# Altium PCB RadiationDetector.PcbDoc (part 3 of 3)
Units mm, origin at the board's own origin, x right, y up, seen from the top; angles counter-clockwise.
Board outline 64 x 110 mm, 2 copper layers (Top Layer, Bottom Layer); 114 components, 79 nets, 398 pads, 0 vias.
Unrouted connection lines stored in the file: 269.
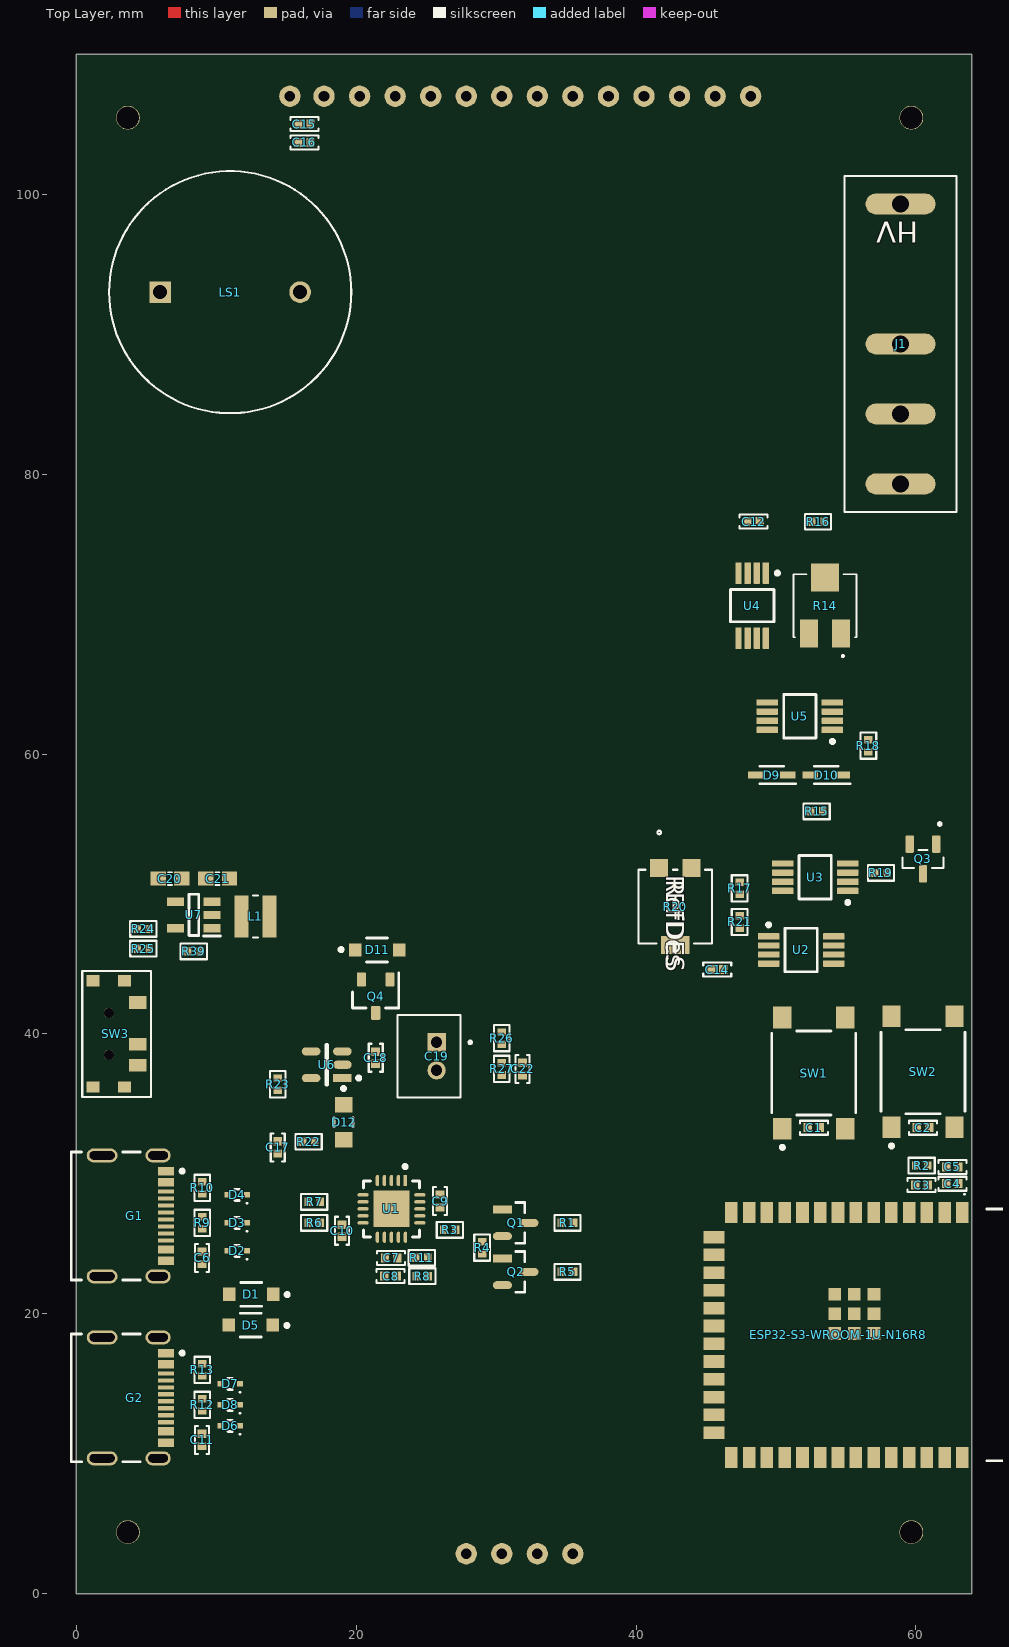
[diagram p0: Top Layer view]

## Part data (continued)
R26: library part RC0402JR-07470KL, "RES 470K OHM 5% 1/16W 0402", Case/Package=0402, LCSC Part Number=C137865, Manufacturer=Yageo, Max Operating Temperature=155°C, Min Operating Temperature=-55°C, Package Height=0.35mm, Package Length=1mm, Package Shape=Rectangular, Package Width=0.5mm, Power=62.5mW, Rated Temperature=70°C, Resistor Type="FIXED RESISTOR", Supplier Part Number=311-470KJRDKR-ND, Temperature Coefficient (ppm/Cel)=100, Tolerance=5%, Working Voltage=50V, Additional Feature="LASER TRIMMABLE", Category="Chip SMD Resistors", ComponentLink1Description=https://datasheet.ciiva.com:443/pdfs/VipMasterIC/IC/YAGO/YAGO-S-A0008145938/YAGO-S-A0008145938-1.pdf?src-supplier=IHS+Markit, ComponentLink1URL=https://datasheet.ciiva.com:443/pdfs/VipMasterIC/IC/YAGO/YAGO-S-A0008145938/YAGO-S-A0008145938-1.pdf?src-supplier=IHS+Markit, ComponentLink2Description=https://datasheet.ciiva.com/2452/pyu-r-int-thick-7-2452630.pdf?src-supplier=Digikey, ComponentLink2URL=https://datasheet.ciiva.com/2452/pyu-r-int-thick-7-2452630.pdf?src-supplier=Digikey, ComponentLink3Description=https://datasheet.ciiva.com/2452/pyu-r-int-thick-7-2452631.pdf?src-supplier=Digikey, ComponentLink3URL=https://datasheet.ciiva.com/2452/pyu-r-int-thick-7-2452631.pdf?src-supplier=Digikey, ComponentLink4Description=https://datasheet.ciiva.com/2452/pyu-r-int-thick-7-2452629.pdf?src-supplier=Digikey, ComponentLink4URL=https://datasheet.ciiva.com/2452/pyu-r-int-thick-7-2452629.pdf?src-supplier=Digikey, ComponentLink5Description=https://datasheet.ciiva.com/12667/pyu-rc0402-51-rohs-l-6-r-12667098.pdf?src-supplier=Mouser, ComponentLink5URL=https://datasheet.ciiva.com/12667/pyu-rc0402-51-rohs-l-6-r-12667098.pdf?src-supplier=Mouser, ComponentLink6Description=https://datasheet.ciiva.com/7850/1018594-7850214.pdf?src-supplier=Element14, ComponentLink6URL=https://datasheet.ciiva.com/7850/1018594-7850214.pdf?src-supplier=Element14, ComponentLink7Description=https://datasheet.ciiva.com/7850/1018594-7850215.pdf?src-supplier=Element14, ComponentLink7URL=https://datasheet.ciiva.com/7850/1018594-7850215.pdf?src-supplier=Element14, Construction=Chip, JESD-609 Code=e3, Manufacturer Part Number=RC0402JR-07470KL, Mounting Technology="Surface Mount", Packaging="Tape and Reel", Pins=2, Pricing="1=0,1, 10=0,006, 50=0,0056, 100=0,0051, 500=0,0046, 1000=0,00408, 5000=0,00284 (USD)", Reach SVHC Compliant=Yes, RoHS=Yes, RoHS Compliant=Yes, Stock=161829, Supplier=Digikey, Technology="METAL GLAZE/THICK FILM", Terminal Finish=Nickel, Termination=Wraparound
R27: library part RC0402JR-07150KL, "RES 150K OHM 5% 1/16W 0402", Case/Package=0402, LCSC Part Number=C93947, Manufacturer=Yageo, Max Operating Temperature=155°C, Min Operating Temperature=-55°C, Package Height=0.35mm, Package Length=1mm, Package Shape=Rectangular, Package Width=0.5mm, Power=62.5mW, Rated Temperature=70°C, Resistor Type="FIXED RESISTOR", Supplier Part Number=311-150KJRCT-ND, Temperature Coefficient (ppm/Cel)=100, Tolerance=5%, Working Voltage=50V, Additional Feature="LASER TRIMMABLE", Category="Chip SMD Resistors", ComponentLink1Description=https://datasheet.ciiva.com:443/pdfs/VipMasterIC/IC/YAGO/YAGO-S-A0008145938/YAGO-S-A0008145938-1.pdf?src-supplier=IHS+Markit, ComponentLink1URL=https://datasheet.ciiva.com:443/pdfs/VipMasterIC/IC/YAGO/YAGO-S-A0008145938/YAGO-S-A0008145938-1.pdf?src-supplier=IHS+Markit, ComponentLink2Description=https://datasheet.ciiva.com/7983/1018594-7983551.pdf?src-supplier=Element14, ComponentLink2URL=https://datasheet.ciiva.com/7983/1018594-7983551.pdf?src-supplier=Element14, ComponentLink3Description=https://datasheet.ciiva.com/2518/pyu-r-int-thick-7-2518929.pdf?src-supplier=Digikey, ComponentLink3URL=https://datasheet.ciiva.com/2518/pyu-r-int-thick-7-2518929.pdf?src-supplier=Digikey, ComponentLink4Description=https://datasheet.ciiva.com/2518/pyu-r-int-thick-7-2518930.pdf?src-supplier=Digikey, ComponentLink4URL=https://datasheet.ciiva.com/2518/pyu-r-int-thick-7-2518930.pdf?src-supplier=Digikey, ComponentLink5Description=https://datasheet.ciiva.com/2518/pyu-r-int-thick-7-2518928.pdf?src-supplier=Digikey, ComponentLink5URL=https://datasheet.ciiva.com/2518/pyu-r-int-thick-7-2518928.pdf?src-supplier=Digikey, ComponentLink6Description=https://datasheet.ciiva.com/7850/1018594-7850149.pdf?src-supplier=Element14, ComponentLink6URL=https://datasheet.ciiva.com/7850/1018594-7850149.pdf?src-supplier=Element14, ComponentLink7Description=https://datasheet.ciiva.com/17072/pyu-rc0402-51-rohs-l-6-r-17072379.pdf?src-supplier=Future+Electronics, ComponentLink7URL=https://datasheet.ciiva.com/17072/pyu-rc0402-51-rohs-l-6-r-17072379.pdf?src-supplier=Future+Electronics, ComponentLink8Description=https://datasheet.ciiva.com/15189/getdatasheetpartid-251830-15189543.pdf?src-supplier=Verical, ComponentLink8URL=https://datasheet.ciiva.com/15189/getdatasheetpartid-251830-15189543.pdf?src-supplier=Verical, Construction=Chip, JESD-609 Code=e3, Manufacturer Part Number=RC0402JR-07150KL, Mounting Technology="Surface Mount", Packaging="Tape and Reel", Pins=2, Pricing="1=0,1, 10=0,006, 50=0,0052, 100=0,0041, 500=0,00356, 1000=0,00306 (USD)", Reach SVHC Compliant=Yes, RoHS=Yes, RoHS Compliant=Yes, Stock=408329, Supplier=Digikey, Technology="METAL GLAZE/THICK FILM", Terminal Finish=Nickel, Termination=Wraparound
R28: library part AC0402FR-07560RL, "RES SMD 560 OHM 1% 1/16W 0402", Case/Package=0402, LCSC Part Number=C144747, Manufacturer=Yageo, Max Operating Temperature=155°C, Min Operating Temperature=-55°C, Package Height=0.32mm, Package Length=1mm, Package Shape=Rectangular, Package Width=0.5mm, Power=62.5mW, Rated Temperature=70°C, Resistor Type="FIXED RESISTOR", Supplier Part Number=13-AC0402FR-07560RLCT-ND, Temperature Coefficient (ppm/Cel)=100, Tolerance=1%, Working Voltage=50V, Additional Feature="LASER TRIMMABLE", Category="Chip SMD Resistors", ComponentLink1Description=https://datasheet.ciiva.com:443/pdfs/VipMasterIC/IC/YAGO/YAGO-S-A0003597364/YAGO-S-A0003597364-1.pdf?src-supplier=IHS+Markit, ComponentLink1URL=https://datasheet.ciiva.com:443/pdfs/VipMasterIC/IC/YAGO/YAGO-S-A0003597364/YAGO-S-A0003597364-1.pdf?src-supplier=IHS+Markit, ComponentLink2Description=http://www.mouser.com/ds/2/447/yageodocoutput-1111992.pdf?src-supplier=Mouser, ComponentLink2URL=http://www.mouser.com/ds/2/447/yageodocoutput-1111992.pdf?src-supplier=Mouser, ComponentLink3Description=https://datasheet.octopart.com/AC0402FR-07560RL-Yageo-datasheet-151884373.pdf?src-supplier=Future+Electronics, ComponentLink3URL=https://datasheet.octopart.com/AC0402FR-07560RL-Yageo-datasheet-151884373.pdf?src-supplier=Future+Electronics, ComponentLink4Description=http://www.yageo.com/documents/recent/PYu-AC_51_RoHS_L_2_revised.pdf?src-supplier=Future+Electronics, ComponentLink4URL=http://www.yageo.com/documents/recent/PYu-AC_51_RoHS_L_2_revised.pdf?src-supplier=Future+Electronics, ComponentLink5Description=http://www.yageo.com/NewPortal/yageodocoutput?fileName=/pdf/R-Chip/PYu-AC_51_RoHS_L_6.pdf&src-supplier=Digikey, ComponentLink5URL=http://www.yageo.com/NewPortal/yageodocoutput?fileName=/pdf/R-Chip/PYu-AC_51_RoHS_L_6.pdf&src-supplier=Digikey, ComponentLink6Description=https://datasheet.octopart.com/AC0402FR-07560RL-Yageo-datasheet-178509465.pdf?src-supplier=Newark, ComponentLink6URL=https://datasheet.octopart.com/AC0402FR-07560RL-Yageo-datasheet-178509465.pdf?src-supplier=Newark, Construction=Chip, JESD-609 Code=e3, Manufacturer Part Number=AC0402FR-07560RL, Mounting Technology="Surface Mount", Packaging="Tape and Reel", Pins=2, Pricing="1=0,1, 10=0,008, 100=0,0041, 1000=0,00357, 2500=0,00306 (USD)", Reach SVHC Compliant=Yes, Reference Standard=AEC-Q200, RoHS=Yes, RoHS Compliant=Yes, Stock=15456, Supplier=Digikey, Technology="METAL GLAZE/THICK FILM", Terminal Finish=Nickel, Termination=Wraparound
R29: library part AC0402FR-071ML, "RES SMD 1M OHM 1% 1/16W 0402", Case/Package=0402, LCSC Part Number=C144787, Manufacturer=Yageo, Max Operating Temperature=155°C, Min Operating Temperature=-55°C, Package Height=0.32mm, Package Length=1mm, Package Shape=Rectangular, Package Width=0.5mm, Power=62.5mW, Rated Temperature=70°C, Resistor Type="FIXED RESISTOR", Supplier Part Number=YAG3450CT-ND, Temperature Coefficient (ppm/Cel)=100, Tolerance=1%, Working Voltage=50V, Additional Feature="LASER TRIMMABLE", Category="Chip SMD Resistors", ComponentLink1Description=https://datasheet.ciiva.com:443/pdfs/VipMasterIC/IC/YAGO/YAGO-S-A0003597364/YAGO-S-A0003597364-1.pdf?src-supplier=IHS+Markit, ComponentLink1URL=https://datasheet.ciiva.com:443/pdfs/VipMasterIC/IC/YAGO/YAGO-S-A0003597364/YAGO-S-A0003597364-1.pdf?src-supplier=IHS+Markit, ComponentLink2Description=http://www.yageo.com/documents/recent/PYu-AC_51_RoHS_L_2.pdf?src-supplier=Mouser, ComponentLink2URL=http://www.yageo.com/documents/recent/PYu-AC_51_RoHS_L_2.pdf?src-supplier=Mouser, ComponentLink3Description=http://www.yageo.com/NewPortal/yageodocoutput?fileName=/pdf/R-Chip/PYu-AC_51_RoHS_L_6.pdf&src-supplier=Digikey, ComponentLink3URL=http://www.yageo.com/NewPortal/yageodocoutput?fileName=/pdf/R-Chip/PYu-AC_51_RoHS_L_6.pdf&src-supplier=Digikey, ComponentLink4Description=http://www.yageo.com/documents/recent/PYu-AC_51_RoHS_L_2_revised.pdf?src-supplier=Future+Electronics, ComponentLink4URL=http://www.yageo.com/documents/recent/PYu-AC_51_RoHS_L_2_revised.pdf?src-supplier=Future+Electronics, Construction=Chip, JESD-609 Code=e3, Manufacturer Part Number=AC0402FR-071ML, Mounting Technology="Surface Mount", Packaging="Tape and Reel", Pins=2, Pricing="1=0,1, 10=0,009, 100=0,0071, 1000=0,00612, 2500=0,0051, 5000=0,00407 (USD)", Reach SVHC Compliant=Yes, Reference Standard=AEC-Q200, RoHS=Yes, RoHS Compliant=Yes, Stock=95082, Supplier=Digikey, Technology="METAL GLAZE/THICK FILM", Terminal Finish=Nickel, Termination=Wraparound
R30: library part AC0402FR-0710ML, "RES SMD 10M OHM 1% 1/16W 0402", Case/Package=0402, LCSC Part Number=C144806, Manufacturer=Yageo, Max Operating Temperature=155°C, Min Operating Temperature=-55°C, Package Height=0.32mm, Package Length=1mm, Package Shape=Rectangular, Package Width=0.5mm, Power=62.5mW, Rated Temperature=70°C, Resistor Type="FIXED RESISTOR", Supplier Part Number=YAG3437CT-ND, Temperature Coefficient (ppm/Cel)=100, Tolerance=1%, Working Voltage=50V, Additional Feature="LASER TRIMMABLE", Category="Chip SMD Resistors", ComponentLink1Description=https://datasheet.ciiva.com:443/pdfs/VipMasterIC/IC/YAGO/YAGO-S-A0003597364/YAGO-S-A0003597364-1.pdf?src-supplier=IHS+Markit, ComponentLink1URL=https://datasheet.ciiva.com:443/pdfs/VipMasterIC/IC/YAGO/YAGO-S-A0003597364/YAGO-S-A0003597364-1.pdf?src-supplier=IHS+Markit, ComponentLink2Description=https://datasheet.octopart.com/AC0402FR-0710ML-Yageo-datasheet-166720450.pdf?src-supplier=Future+Electronics, ComponentLink2URL=https://datasheet.octopart.com/AC0402FR-0710ML-Yageo-datasheet-166720450.pdf?src-supplier=Future+Electronics, ComponentLink3Description=http://www.yageo.com/NewPortal/yageodocoutput?fileName=/pdf/R-Chip/PYu-AC_51_RoHS_L_6.pdf&src-supplier=Digikey, ComponentLink3URL=http://www.yageo.com/NewPortal/yageodocoutput?fileName=/pdf/R-Chip/PYu-AC_51_RoHS_L_6.pdf&src-supplier=Digikey, ComponentLink4Description=https://datasheet.octopart.com/AC0402FR-0710ML-Yageo-datasheet-178509465.pdf?src-supplier=Farnell, ComponentLink4URL=https://datasheet.octopart.com/AC0402FR-0710ML-Yageo-datasheet-178509465.pdf?src-supplier=Farnell, ComponentLink5Description=https://datasheet.octopart.com/AC0402FR-0710ML-Yageo-datasheet-178509465.pdf?src-supplier=Newark, ComponentLink5URL=https://datasheet.octopart.com/AC0402FR-0710ML-Yageo-datasheet-178509465.pdf?src-supplier=Newark, ComponentLink6Description=https://datasheet.octopart.com/AC0402FR-0710ML-Yageo-datasheet-178509465.pdf?src-supplier=Element14, ComponentLink6URL=https://datasheet.octopart.com/AC0402FR-0710ML-Yageo-datasheet-178509465.pdf?src-supplier=Element14, Construction=Chip, JESD-609 Code=e3, Manufacturer Part Number=AC0402FR-0710ML, Mounting Technology="Surface Mount", Packaging="Tape and Reel", Pins=2, Pricing="1=0,1, 10=0,009, 100=0,0071, 1000=0,0051, 2500=0,00407 (USD)", Reach SVHC Compliant=Yes, Reference Standard=AEC-Q200, RoHS=Yes, RoHS Compliant=Yes, Stock=52815, Supplier=Digikey, Technology="METAL GLAZE/THICK FILM", Terminal Finish=Nickel, Termination=Wraparound
R31 R33 R34: library part RC1206FR-074M99L, "RES 4.99M OHM 1% 1/4W 1206", Case/Package=1206, LCSC Part Number=C488845, Manufacturer=Yageo, Max Operating Temperature=155°C, Min Operating Temperature=-55°C, Package Height=0.55mm, Package Length=3.1mm, Package Shape=Rectangular, Package Width=1.6mm, Power=250mW, Rated Temperature=70°C, Resistor Type="FIXED RESISTOR", Supplier Part Number=311-4.99MFRDKR-ND, Temperature Coefficient (ppm/Cel)=100, Tolerance=1%, Working Voltage=200V, Additional Feature="LASER TRIMMABLE", Category="Chip SMD Resistors", ComponentLink1Description=https://datasheet.ciiva.com:443/pdfs/VipMasterIC/IC/YAGO/YAGO-S-A0008145938/YAGO-S-A0008145938-1.pdf?src-supplier=IHS+Markit, ComponentLink1URL=https://datasheet.ciiva.com:443/pdfs/VipMasterIC/IC/YAGO/YAGO-S-A0008145938/YAGO-S-A0008145938-1.pdf?src-supplier=IHS+Markit, ComponentLink2Description=https://datasheet.ciiva.com/2521/pyu-rc1206-51-rohs-l-4-2521020.pdf?src-supplier=Digikey, ComponentLink2URL=https://datasheet.ciiva.com/2521/pyu-rc1206-51-rohs-l-4-2521020.pdf?src-supplier=Digikey, ComponentLink3Description=https://datasheet.ciiva.com/2521/pyu-rc1206-51-rohs-l-4-2521021.pdf?src-supplier=Digikey, ComponentLink3URL=https://datasheet.ciiva.com/2521/pyu-rc1206-51-rohs-l-4-2521021.pdf?src-supplier=Digikey, ComponentLink4Description=https://datasheet.ciiva.com/2521/pyu-rc1206-51-rohs-l-4-2521019.pdf?src-supplier=Digikey, ComponentLink4URL=https://datasheet.ciiva.com/2521/pyu-rc1206-51-rohs-l-4-2521019.pdf?src-supplier=Digikey, Construction=Chip, JESD-609 Code=e3, Manufacturer Part Number=RC1206FR-074M99L, Mounting Technology="Surface Mount", Packaging="Tape and Reel", Pins=2, Pricing="1=0,1, 10=0,02, 100=0,0153, 1000=0,01224, 2500=0,01059 (USD)", Reach SVHC Compliant=Yes, RoHS=Yes, RoHS Compliant=Yes, Supplier=Digikey, Technology="METAL GLAZE/THICK FILM", Terminal Finish=Nickel, Termination=Wraparound
R35: library part AC0402FR-0782KL, "RES SMD 82K OHM 1% 1/16W 0402", Case/Package=0402, LCSC Part Number=C144735, Manufacturer=Yageo, Max Operating Temperature=155°C, Min Operating Temperature=-55°C, Package Height=0.32mm, Package Length=1mm, Package Shape=Rectangular, Package Width=0.5mm, Power=62.5mW, Rated Temperature=70°C, Resistor Type="FIXED RESISTOR", Supplier Part Number=YAG5311CT-ND, Temperature Coefficient (ppm/Cel)=100, Tolerance=1%, Working Voltage=50V, Additional Feature="LASER TRIMMABLE", Category="Chip SMD Resistors", ComponentLink1Description=https://datasheet.ciiva.com:443/pdfs/VipMasterIC/IC/YAGO/YAGO-S-A0003597364/YAGO-S-A0003597364-1.pdf?src-supplier=IHS+Markit, ComponentLink1URL=https://datasheet.ciiva.com:443/pdfs/VipMasterIC/IC/YAGO/YAGO-S-A0003597364/YAGO-S-A0003597364-1.pdf?src-supplier=IHS+Markit, ComponentLink2Description=http://www.yageo.com/NewPortal/yageodocoutput?fileName=/pdf/R-Chip/PYu-AC_51_RoHS_L_5.pdf&src-supplier=Digikey, ComponentLink2URL=http://www.yageo.com/NewPortal/yageodocoutput?fileName=/pdf/R-Chip/PYu-AC_51_RoHS_L_5.pdf&src-supplier=Digikey, ComponentLink3Description=https://www.yageo.com/upload/media/product/productsearch/datasheet/rchip/PYu-AC_51_RoHS_L_7.pdf?src-supplier=Digikey, ComponentLink3URL=https://www.yageo.com/upload/media/product/productsearch/datasheet/rchip/PYu-AC_51_RoHS_L_7.pdf?src-supplier=Digikey, ComponentLink4Description=http://www.yageo.com/NewPortal/yageodocoutput?fileName=/pdf/R-Chip/PYu-AC_51_RoHS_L_6.pdf&src-supplier=Digikey, ComponentLink4URL=http://www.yageo.com/NewPortal/yageodocoutput?fileName=/pdf/R-Chip/PYu-AC_51_RoHS_L_6.pdf&src-supplier=Digikey, ComponentLink5Description=https://datasheet.octopart.com/AC0402FR-0782KL-Yageo-datasheet-151884373.pdf?src-supplier=Future+Electronics, ComponentLink5URL=https://datasheet.octopart.com/AC0402FR-0782KL-Yageo-datasheet-151884373.pdf?src-supplier=Future+Electronics, ComponentLink6Description=http://www.yageo.com/documents/recent/PYu-AC_51_RoHS_L_2_revised.pdf?src-supplier=Future+Electronics, ComponentLink6URL=http://www.yageo.com/documents/recent/PYu-AC_51_RoHS_L_2_revised.pdf?src-supplier=Future+Electronics, Construction=Chip, JESD-609 Code=e3, Manufacturer Part Number=AC0402FR-0782KL, Mounting Technology="Surface Mount", Packaging="Tape and Reel", Pins=2, Pricing="1=0,1, 10=0,009, 100=0,0071, 1000=0,0051, 2500=0,00407 (USD)", Reach SVHC Compliant=Yes, Reference Standard=AEC-Q200, RoHS=Yes, RoHS Compliant=Yes, Stock=68666, Supplier=Digikey, Technology="METAL GLAZE/THICK FILM", Terminal Finish=Nickel, Termination=Wraparound
R36: library part AC0402FR-07200KL, "RES SMD 200K OHM 1% 1/16W 0402", Case/Package=0402, LCSC Part Number=C144785, Manufacturer=Yageo, Max Operating Temperature=155°C, Min Operating Temperature=-55°C, Package Height=0.32mm, Package Length=1mm, Package Shape=Rectangular, Package Width=0.5mm, Power=62.5mW, Rated Temperature=70°C, Resistor Type="FIXED RESISTOR", Supplier Part Number=YAG3452CT-ND, Temperature Coefficient (ppm/Cel)=100, Tolerance=1%, Working Voltage=50V, Additional Feature="LASER TRIMMABLE", Category="Chip SMD Resistors", ComponentLink1Description=https://datasheet.ciiva.com:443/pdfs/VipMasterIC/IC/YAGO/YAGO-S-A0003597364/YAGO-S-A0003597364-1.pdf?src-supplier=IHS+Markit, ComponentLink1URL=https://datasheet.ciiva.com:443/pdfs/VipMasterIC/IC/YAGO/YAGO-S-A0003597364/YAGO-S-A0003597364-1.pdf?src-supplier=IHS+Markit, ComponentLink2Description=http://www.mouser.com/ds/2/447/yageodocoutput-1111992.pdf?src-supplier=Mouser, ComponentLink2URL=http://www.mouser.com/ds/2/447/yageodocoutput-1111992.pdf?src-supplier=Mouser, ComponentLink3Description=https://datasheet.octopart.com/AC0402FR-07200KL-Yageo-datasheet-178509465.pdf?src-supplier=Farnell, ComponentLink3URL=https://datasheet.octopart.com/AC0402FR-07200KL-Yageo-datasheet-178509465.pdf?src-supplier=Farnell, ComponentLink4Description=https://datasheet.octopart.com/AC0402FR-07200KL-Yageo-datasheet-178509465.pdf?src-supplier=Element14, ComponentLink4URL=https://datasheet.octopart.com/AC0402FR-07200KL-Yageo-datasheet-178509465.pdf?src-supplier=Element14, ComponentLink5Description=https://datasheet.octopart.com/AC0402FR-07200KL-Yageo-datasheet-178509465.pdf?src-supplier=Newark, ComponentLink5URL=https://datasheet.octopart.com/AC0402FR-07200KL-Yageo-datasheet-178509465.pdf?src-supplier=Newark, ComponentLink6Description=https://datasheet.octopart.com/AC0402FR-07200KL-Yageo-datasheet-166720450.pdf?src-supplier=Future+Electronics, ComponentLink6URL=https://datasheet.octopart.com/AC0402FR-07200KL-Yageo-datasheet-166720450.pdf?src-supplier=Future+Electronics, ComponentLink7Description=http://www.yageo.com/documents/recent/PYu-AC_51_RoHS_L_2_revised.pdf?src-supplier=Future+Electronics, ComponentLink7URL=http://www.yageo.com/documents/recent/PYu-AC_51_RoHS_L_2_revised.pdf?src-supplier=Future+Electronics, ComponentLink8Description=http://www.yageo.com/NewPortal/yageodocoutput?fileName=/pdf/R-Chip/PYu-AC_51_RoHS_L_6.pdf&src-supplier=Digikey, ComponentLink8URL=http://www.yageo.com/NewPortal/yageodocoutput?fileName=/pdf/R-Chip/PYu-AC_51_RoHS_L_6.pdf&src-supplier=Digikey, ComponentLink9Description=https://www.yageo.com/upload/media/product/productsearch/datasheet/rchip/PYu-AC_51_RoHS_L_7.pdf?src-supplier=Digikey, ComponentLink9URL=https://www.yageo.com/upload/media/product/productsearch/datasheet/rchip/PYu-AC_51_RoHS_L_7.pdf?src-supplier=Digikey, Construction=Chip, JESD-609 Code=e3, Manufacturer Part Number=AC0402FR-07200KL, Mounting Technology="Surface Mount", Packaging="Tape and Reel", Pins=2, Pricing="1=0,1, 10=0,005, 100=0,0047, 1000=0,00407 (USD)", Reach SVHC Compliant=Yes, Reference Standard=AEC-Q200, RoHS=Yes, RoHS Compliant=Yes, Stock=236735, Supplier=Digikey, Technology="METAL GLAZE/THICK FILM", Terminal Finish=Nickel, Termination=Wraparound
R37: library part AC0402FR-072ML, "RES SMD 2M OHM 1% 1/16W 0402", Case/Package=0402, LCSC Part Number=C180352, Manufacturer=Yageo, Max Operating Temperature=155°C, Min Operating Temperature=-55°C, Package Height=0.32mm, Package Length=1mm, Package Shape=Rectangular, Package Width=0.5mm, Power=62.5mW, Rated Temperature=70°C, Resistor Type="FIXED RESISTOR", Supplier Part Number=13-AC0402FR-072MLDKR-ND, Temperature Coefficient (ppm/Cel)=100, Tolerance=1%, Working Voltage=50V, Additional Feature="LASER TRIMMABLE", Category="Chip SMD Resistors", ComponentLink1Description=https://datasheet.ciiva.com:443/pdfs/VipMasterIC/IC/YAGO/YAGO-S-A0003597364/YAGO-S-A0003597364-1.pdf?src-supplier=IHS+Markit, ComponentLink1URL=https://datasheet.ciiva.com:443/pdfs/VipMasterIC/IC/YAGO/YAGO-S-A0003597364/YAGO-S-A0003597364-1.pdf?src-supplier=IHS+Markit, ComponentLink2Description=https://datasheet.octopart.com/AC0402FR-072ML-Yageo-datasheet-178509465.pdf?src-supplier=Newark, ComponentLink2URL=https://datasheet.octopart.com/AC0402FR-072ML-Yageo-datasheet-178509465.pdf?src-supplier=Newark, ComponentLink3Description=http://www.yageo.com/NewPortal/yageodocoutput?fileName=/pdf/R-Chip/PYu-AC_51_RoHS_L_6.pdf&src-supplier=Digikey, ComponentLink3URL=http://www.yageo.com/NewPortal/yageodocoutput?fileName=/pdf/R-Chip/PYu-AC_51_RoHS_L_6.pdf&src-supplier=Digikey, ComponentLink4Description=https://datasheet.octopart.com/AC0402FR-072ML-Yageo-datasheet-151884373.pdf?src-supplier=Future+Electronics, ComponentLink4URL=https://datasheet.octopart.com/AC0402FR-072ML-Yageo-datasheet-151884373.pdf?src-supplier=Future+Electronics, Construction=Chip, JESD-609 Code=e3, Manufacturer Part Number=AC0402FR-072ML, Mounting Technology="Surface Mount", Packaging="Tape and Reel", Pins=2, Pricing="1=0,1, 10=0,009, 100=0,0071, 1000=0,00612, 2500=0,0051, 5000=0,00407 (USD)", Reach SVHC Compliant=Yes, Reference Standard=AEC-Q200, RoHS=Yes, RoHS Compliant=Yes, Stock=51928, Supplier=Digikey, Technology="METAL GLAZE/THICK FILM", Terminal Finish=Nickel, Termination=Wraparound
R38: library part AC0402JR-073ML, "RES SMD 3M OHM 5% 1/16W 0402", Case/Package=0402, LCSC Part Number=C227371, Manufacturer=Yageo, Max Operating Temperature=155°C, Min Operating Temperature=-55°C, Package Height=0.32mm, Package Length=1mm, Package Shape=Rectangular, Package Width=0.5mm, Power=62.5mW, Rated Temperature=70°C, Resistor Type="FIXED RESISTOR", Supplier Part Number=13-AC0402JR-073MLCT-ND, Temperature Coefficient (ppm/Cel)=100, Tolerance=5%, Working Voltage=50V, Additional Feature="LASER TRIMMABLE", Category="Chip SMD Resistors", ComponentLink1Description=https://datasheet.ciiva.com:443/pdfs/VipMasterIC/IC/YAGO/YAGO-S-A0003597364/YAGO-S-A0003597364-1.pdf?src-supplier=IHS+Markit, ComponentLink1URL=https://datasheet.ciiva.com:443/pdfs/VipMasterIC/IC/YAGO/YAGO-S-A0003597364/YAGO-S-A0003597364-1.pdf?src-supplier=IHS+Markit, ComponentLink2Description=https://datasheet.ciiva.com/12576/pyu-ac-51-rohs-l-2-12576685.pdf?src-supplier=Mouser, ComponentLink2URL=https://datasheet.ciiva.com/12576/pyu-ac-51-rohs-l-2-12576685.pdf?src-supplier=Mouser, Construction=Chip, JESD-609 Code=e3, Manufacturer Part Number=AC0402JR-073ML, Mounting Technology="Surface Mount", Packaging="Tape and Reel", Pins=2, Pricing="1=0,1, 10=0,008, 50=0,0072, 100=0,0061, 500=0,0051, 1000=0,00408 (USD)", Reach SVHC Compliant=Yes, Reference Standard=AEC-Q200, RoHS=Yes, RoHS Compliant=Yes, Stock=20000, Supplier=Digikey, Technology="METAL GLAZE/THICK FILM", Terminal Finish=Nickel, Termination=Wraparound
R39: library part AC0402FR-07100KL, "RES SMD 100K OHM 1% 1/16W 0402", Case/Package=0402, LCSC Part Number=C144809, Manufacturer=Yageo, Max Operating Temperature=155°C, Min Operating Temperature=-55°C, Package Height=0.32mm, Package Length=1mm, Package Shape=Rectangular, Package Width=0.5mm, Power=62.5mW, Rated Temperature=70°C, Resistor Type="FIXED RESISTOR", Supplier Part Number=YAG3434CT-ND, Temperature Coefficient (ppm/Cel)=100, Tolerance=1%, Working Voltage=50V, Additional Feature="LASER TRIMMABLE", Category="Chip SMD Resistors", ComponentLink1Description=https://datasheet.ciiva.com:443/pdfs/VipMasterIC/IC/YAGO/YAGO-S-A0003597364/YAGO-S-A0003597364-1.pdf?src-supplier=IHS+Markit, ComponentLink1URL=https://datasheet.ciiva.com:443/pdfs/VipMasterIC/IC/YAGO/YAGO-S-A0003597364/YAGO-S-A0003597364-1.pdf?src-supplier=IHS+Markit, ComponentLink2Description=https://datasheet.octopart.com/AC0402FR-07100KL-Yageo-datasheet-166720450.pdf?src-supplier=Future+Electronics, ComponentLink2URL=https://datasheet.octopart.com/AC0402FR-07100KL-Yageo-datasheet-166720450.pdf?src-supplier=Future+Electronics, ComponentLink3Description=http://www.yageo.com/NewPortal/yageodocoutput?fileName=/pdf/R-Chip/PYu-AC_51_RoHS_L_6.pdf&src-supplier=Digikey, ComponentLink3URL=http://www.yageo.com/NewPortal/yageodocoutput?fileName=/pdf/R-Chip/PYu-AC_51_RoHS_L_6.pdf&src-supplier=Digikey, ComponentLink4Description=http://www.yageo.com/documents/recent/PYu-AC_51_RoHS_L_2.pdf?src-supplier=Mouser, ComponentLink4URL=http://www.yageo.com/documents/recent/PYu-AC_51_RoHS_L_2.pdf?src-supplier=Mouser, ComponentLink5Description=http://www.yageo.com/documents/recent/PYu-AC_51_RoHS_L_2_revised.pdf?src-supplier=Future+Electronics, ComponentLink5URL=http://www.yageo.com/documents/recent/PYu-AC_51_RoHS_L_2_revised.pdf?src-supplier=Future+Electronics, Construction=Chip, JESD-609 Code=e3, Manufacturer Part Number=AC0402FR-07100KL, Mounting Technology="Surface Mount", Packaging="Tape and Reel", Pins=2, Pricing="1=0,1, 10=0,011, 100=0,0082, 1000=0,00612, 2500=0,0051 (USD)", Reach SVHC Compliant=Yes, Reference Standard=AEC-Q200, RoHS=Yes, RoHS Compliant=Yes, Stock=553072, Supplier=Digikey, Technology="METAL GLAZE/THICK FILM", Terminal Finish=Nickel, Termination=Wraparound
SCREEN1: "Data Line Filter, 1 Function(s)", Manufacturer=TDK, Manufacturer Part Number=PS1720P02, Max Operating Temperature=70°C, Min Operating Temperature=-20°C, Supplier Part Number=445-2527-ND, Category=Buzzers, Channels=1, ComponentLink1Description=https://datasheet.ciiva.com:443/pdfs/VipMasterIC/IC/TDKC/TDKCS08938/TDKCS08938-1.pdf?src-supplier=IHS+Markit, ComponentLink1URL=https://datasheet.ciiva.com:443/pdfs/VipMasterIC/IC/TDKC/TDKCS08938/TDKCS08938-1.pdf?src-supplier=IHS+Markit, ComponentLink2Description=https://datasheet.ciiva.com/4625/ef532-ps-4625320.pdf?src-supplier=Mouser, ComponentLink2URL=https://datasheet.ciiva.com/4625/ef532-ps-4625320.pdf?src-supplier=Mouser, ComponentLink3Description=https://datasheet.ciiva.com/8113/ef532-ps-8113419.pdf?src-supplier=Avnet, ComponentLink3URL=https://datasheet.ciiva.com/8113/ef532-ps-8113419.pdf?src-supplier=Avnet, ComponentLink4Description=https://datasheet.ciiva.com/0/ef532-ps-122.pdf?src-supplier=Digikey, ComponentLink4URL=https://datasheet.ciiva.com/0/ef532-ps-122.pdf?src-supplier=Digikey, ComponentLink5Description=https://datasheet.ciiva.com/1/ef532-ps-1628.pdf?src-supplier=Digikey, ComponentLink5URL=https://datasheet.ciiva.com/1/ef532-ps-1628.pdf?src-supplier=Digikey, ComponentLink6Description=https://datasheet.ciiva.com/16225/ef532-ps-16225129.pdf?src-supplier=Onlinecomponents.com, ComponentLink6URL=https://datasheet.ciiva.com/16225/ef532-ps-16225129.pdf?src-supplier=Onlinecomponents.com, ComponentLink7Description=https://datasheet.ciiva.com/16477/ef532-ps-16477599.pdf?src-supplier=Future+Electronics, ComponentLink7URL=https://datasheet.ciiva.com/16477/ef532-ps-16477599.pdf?src-supplier=Future+Electronics, Diameter=17mm, Filter Type="DATA LINE FILTER", Height=8mm, Mounting Technology="Through Hole", Packaging="Tape and Reel", Pricing="1=0,72, 10=0,587, 25=0,5404, 50=0,5082, 100=0,4777, 250=0,44032, 500=0,4141, 1500=0,37586, 6000=0,3365 (USD)", Reach SVHC Compliant=Yes, RoHS=Yes, RoHS Compliant=Yes, Stock=1498, Supplier=Digikey
SW1 SW2: library part PTS645SH50SMTR92LFS, "SWITCH TACTILE SPST-NO 0.05A 12V", Contact Current(DC)-Max=50mA, Contact DC Max Rating R Load=0.05A@12VDC, Contact Resistance=0.1mR, Contact Voltage(DC)-Max=12V, Dielectric Withstand Volts=250VACV, Insulation Resistance=100GR, LCSC Part Number=C221869, Manufacturer="ITT C&K", Manufacturer Series=PTS645, Max Operating Temperature=60°C, Min Operating Temperature=-20°C, Supplier Part Number=CKN9085CT-ND, Actuator Type=Pushbutton, Body Breadth=5.9944mm, Body Height=3.4544mm, Body Length or Diameter=5.9944mm, Category="Tactile Switches", ComponentLink1Description=https://datasheet.ciiva.com:443/pdfs/VipMasterIC/IC/CKCI/CKCI-S-A0001796527/CKCI-S-A0001796842-1.pdf?src-supplier=IHS+Markit, ComponentLink1URL=https://datasheet.ciiva.com:443/pdfs/VipMasterIC/IC/CKCI/CKCI-S-A0001796527/CKCI-S-A0001796842-1.pdf?src-supplier=IHS+Markit, ComponentLink2Description=https://datasheet.ciiva.com/29903/getdatasheetpartid-773702-29903807.pdf?src-supplier=Verical, ComponentLink2URL=https://datasheet.ciiva.com/29903/getdatasheetpartid-773702-29903807.pdf?src-supplier=Verical, ComponentLink3Description=https://datasheet.ciiva.com/14920/pts645-14920741.pdf?src-supplier=Digikey, ComponentLink3URL=https://datasheet.ciiva.com/14920/pts645-14920741.pdf?src-supplier=Digikey, ComponentLink4Description=https://datasheet.ciiva.com/22637/1707731-22637356.pdf?src-supplier=Element14, ComponentLink4URL=https://datasheet.ciiva.com/22637/1707731-22637356.pdf?src-supplier=Element14, JESD-609 Code=e4, Manufacturer Part Number=PTS645SH50SMTR92LFS, Mounting Technology="Surface Mount", PCB Hole Count=4, Pricing="1=0,33, 10=0,285, 25=0,2692, 100=0,2476, 250=0,23404, 500=0,22418 (USD)", Reach SVHC Compliant=Yes, RoHS=Yes, RoHS Compliant=Yes, Stock=14865, Supplier=Digikey, Switch Action=MOMENTARY, Switch Function=SPST, Switch Type=Keypad, Terminal Finish=Silver, Terminal Length=0.138inch, Termination=Solder
SW3: "Surface Mount, Right Angle 1A SPDT 6V Black 10,000 Cycles SMD Slide Switches ROHS", LCSC Part Number=C2911519
U1: "IC USB SERIAL FULL UART 20QFN", Case/Package=HVQCCN, LCSC Part Number=C132159, Manufacturer=FTDI, Max Operating Temperature=85°C, Max Supply Current=8.4mA, Max Supply Voltage=5.5V, Min Operating Temperature=-40°C, Min Supply Voltage=2.97V, Nominal Supply Voltage=5V, Package Shape=Square, Package Style="CHIP CARRIER, HEAT SINK/SLUG, VERY THIN PROFILEMeter", Power Supplies=3.3/5V, Supplier Part Number=768-1128-1-ND, Temperature Grade=INDUSTRIAL, Category="Interface ICs", ComponentLink1Description=https://datasheet.ciiva.com:443/pdfs/VipMasterIC/IC/FTDI/FTDIS00099/FTDIS00099-1.pdf?src-supplier=IHS+Markit, ComponentLink1URL=https://datasheet.ciiva.com:443/pdfs/VipMasterIC/IC/FTDI/FTDIS00099/FTDIS00099-1.pdf?src-supplier=IHS+Markit, ComponentLink2Description=https://datasheet.ciiva.com/1787/ds-ft231x-1787312.pdf?src-supplier=Digikey, ComponentLink2URL=https://datasheet.ciiva.com/1787/ds-ft231x-1787312.pdf?src-supplier=Digikey, ComponentLink3Description=https://datasheet.ciiva.com/4787/ds-ft231x-13571-4787570.pdf?src-supplier=Mouser, ComponentLink3URL=https://datasheet.ciiva.com/4787/ds-ft231x-13571-4787570.pdf?src-supplier=Mouser, ComponentLink4Description=https://datasheet.ciiva.com/30475/0900766b811020d3-30475405.pdf?src-supplier=Rs, ComponentLink4URL=https://datasheet.ciiva.com/30475/0900766b811020d3-30475405.pdf?src-supplier=Rs, ComponentLink5Description=https://datasheet.ciiva.com/1787/ft-x-series-1787313.pdf?src-supplier=Digikey, ComponentLink5URL=https://datasheet.ciiva.com/1787/ft-x-series-1787313.pdf?src-supplier=Digikey, ComponentLink6Description=https://datasheet.ciiva.com/1787/ft-x-series-1787314.pdf?src-supplier=Digikey, ComponentLink6URL=https://datasheet.ciiva.com/1787/ft-x-series-1787314.pdf?src-supplier=Digikey, Height - Seated (Max)=0.8mm, JESD-30 Code=S-XQCC-N20, Length=4mm, Manufacturer Part Number=FT231XQ-R, Pins=20, Pricing="1=2,34, 25=2,27, 100=2,2, 250=2, 500=1,82002, 1000=1,7625 (USD)", Qualification Status="Not Qualified", Reach SVHC Compliant=Yes, RoHS=Yes, RoHS Compliant=Yes, Stock=35376, Supplier=Digikey, Surface Mount=Yes, Technology=CMOS, Terminal Form="No Lead", Terminal Pitch=0.5mm, Terminal Position=QUAD, Width=4mm
U2 U3 U4 U5: "IC OPAMP VFB 2 CIRCUIT 8VSSOP", Case/Package=TSSOP, LCSC Part Number=C95502, Manufacturer="Texas Instruments", Max Operating Temperature=125°C, Max Supply Voltage=2.75V, Min Operating Temperature=-40°C, Min Supply Voltage=1.25V, Package Body Material=Plastic, Package Shape=Square, Package Style="SMALL OUTLINE, HEAT SINK/SLUG, THIN PROFILE, SHRINK PITCHMeter", Peak Reflow Temperature (Cel)=260°C, Supplier Part Number=296-12642-2-ND, Temperature Grade=AUTOMOTIVE, Bandwidth-Nom=250MHz, Category="Amplifiers - Op Amps, Buffer, Instrumentation", Channels=2, ComponentLink1Description=https://www.ti.com:443/lit/ds/symlink/opa2354.pdf?src-supplier=IHS+Markit, ComponentLink1URL=https://www.ti.com:443/lit/ds/symlink/opa2354.pdf?src-supplier=IHS+Markit, ComponentLink2Description=https://datasheet.ciiva.com/1798/opa354-1798288.pdf?src-supplier=Digikey, ComponentLink2URL=https://datasheet.ciiva.com/1798/opa354-1798288.pdf?src-supplier=Digikey, ComponentLink3Description=https://datasheet.ciiva.com/23838/opa2354-23838874.pdf?src-supplier=Newark, ComponentLink3URL=https://datasheet.ciiva.com/23838/opa2354-23838874.pdf?src-supplier=Newark, ComponentLink4Description=https://datasheet.ciiva.com/1798/opa354-1798289.pdf?src-supplier=Digikey, ComponentLink4URL=https://datasheet.ciiva.com/1798/opa354-1798289.pdf?src-supplier=Digikey, ComponentLink5Description=https://datasheet.ciiva.com/1798/opa354-1798290.pdf?src-supplier=Digikey, ComponentLink5URL=https://datasheet.ciiva.com/1798/opa354-1798290.pdf?src-supplier=Digikey, ComponentLink6Description=https://datasheet.ciiva.com/14456/sbos233e-14456446.pdf?src-supplier=Avnet, ComponentLink6URL=https://datasheet.ciiva.com/14456/sbos233e-14456446.pdf?src-supplier=Avnet, Consumer IC Type="VIDEO AMPLIFIER", Height - Seated (Max)=1.1mm, JESD-30 Code=S-PDSO-G8, JESD-609 Code=e4, Length=3mm, Manufacturer Part Number=OPA2354AIDGKR, Moisture Sensitivity Level=2, Number of Channels=1, Pins=8, Pricing="2500=1,67764, 5000=1,64498 (USD)", Qualification Status="Not Qualified", Reach SVHC Compliant=Yes, RoHS=Yes, RoHS Compliant=Yes, Stock=1940, Supplier=Digikey, Surface Mount=Yes, Technology=CMOS, Terminal Finish=Nickel, Terminal Form="Gull Wing", Terminal Pitch=0.65mm, Terminal Position=DUAL, Width=3mm
U6: "Power Supply Support Circuit, Adjustable, 1 Channel, PDSO5", Case/Package=LSSOP, LCSC Part Number=C424093, Manufacturer=Microchip, Max Operating Temperature=85°C, Max Supply Voltage=6V, Min Operating Temperature=-40°C, Min Supply Voltage=3.75V, Nominal Supply Voltage=5.2V, Package Body Material=Plastic, Package Equivalence Code=TSOP5/6,.11,37, Package Shape=Rectangular, Package Style="SMALL OUTLINE, LOW PROFILE, SHRINK PITCHMeter", Peak Reflow Temperature (Cel)=260°C, Power Supplies=3.3/5V, Supplier Part Number=1332158, Supply Current-Max (Isup)=1.5mA, Temperature Grade=INDUSTRIAL, Time @ Peak Reflow Temperature-Max (s)=40s, Adjustable Threshold=Yes, Category="Battery Management", Channels=1, ComponentLink1Description=https://datasheet.ciiva.com:443/pdfs/VipMasterIC/IC/MCHP/MCHPS05673/MCHPS05673-1.pdf?src-supplier=IHS+Markit, ComponentLink1URL=https://datasheet.ciiva.com:443/pdfs/VipMasterIC/IC/MCHP/MCHPS05673/MCHPS05673-1.pdf?src-supplier=IHS+Markit, ComponentLink2Description=https://datasheet.ciiva.com/22828/0900766b80d2b53a-22828876.pdf?src-supplier=Rs, ComponentLink2URL=https://datasheet.ciiva.com/22828/0900766b80d2b53a-22828876.pdf?src-supplier=Rs, ComponentLink3Description=https://datasheet.ciiva.com/26344/651521-da-01-en-contr-mcp73831t-2aci-ot-sot-23-5-mcp-26344458.pdf?src-supplier=Conrad, ComponentLink3URL=https://datasheet.ciiva.com/26344/651521-da-01-en-contr-mcp73831t-2aci-ot-sot-23-5-mcp-26344458.pdf?src-supplier=Conrad, ComponentLink4Description=https://datasheet.ciiva.com/1137/630369-1137803.pdf?src-supplier=Element14, ComponentLink4URL=https://datasheet.ciiva.com/1137/630369-1137803.pdf?src-supplier=Element14, ComponentLink5Description=https://datasheet.ciiva.com/46385/630369-46385324.pdf?src-supplier=Element14, ComponentLink5URL=https://datasheet.ciiva.com/46385/630369-46385324.pdf?src-supplier=Element14, ComponentLink6Description=https://datasheet.ciiva.com/16286/filehandler-aspxddocname-en025112-16286957.pdf?src-supplier=Future+Electronics, ComponentLink6URL=https://datasheet.ciiva.com/16286/filehandler-aspxddocname-en025112-16286957.pdf?src-supplier=Future+Electronics, ComponentLink7Description=https://datasheet.ciiva.com/1931/21984e-1931954.pdf?src-supplier=Digikey, ComponentLink7URL=https://datasheet.ciiva.com/1931/21984e-1931954.pdf?src-supplier=Digikey, ComponentLink8Description=https://datasheet.ciiva.com/1931/21984e-1931955.pdf?src-supplier=Digikey, ComponentLink8URL=https://datasheet.ciiva.com/1931/21984e-1931955.pdf?src-supplier=Digikey, ComponentLink9Description=https://datasheet.ciiva.com/1931/21984e-1931953.pdf?src-supplier=Digikey, ComponentLink9URL=https://datasheet.ciiva.com/1931/21984e-1931953.pdf?src-supplier=Digikey, ComponentLink10Description=https://datasheet.ciiva.com/28626/630369-28626439.pdf?src-supplier=Element14, ComponentLink10URL=https://datasheet.ciiva.com/28626/630369-28626439.pdf?src-supplier=Element14, ComponentLink11Description=https://datasheet.ciiva.com/1144/630369-1144461.pdf?src-supplier=Newark, ComponentLink11URL=https://datasheet.ciiva.com/1144/630369-1144461.pdf?src-supplier=Newark, ComponentLink12Description=https://datasheet.ciiva.com/3213/21984e-3213404.pdf?src-supplier=Avnet, ComponentLink12URL=https://datasheet.ciiva.com/3213/21984e-3213404.pdf?src-supplier=Avnet, Height - Seated (Max)=1.45mm, JESD-30 Code=R-PDSO-G5, JESD-609 Code=e3, Length=2.95mm, Manufacturer Part Number=MCP73831T-2ACI/OT, Moisture Sensitivity Level=1, Number of Channels=1, Pins=5, Pricing="1=0,754, 25=0,625, 100=0,607, 3000=0,595 (EUR)", Qualification Status="Not Qualified", Reach SVHC Compliant=Yes, RoHS=Yes, RoHS Compliant=Yes, Stock=23698, Supplier=Farnell, Surface Mount=Yes, Terminal Finish=Tin, Terminal Form="Gull Wing", Terminal Pitch=0.95mm, Terminal Position=DUAL, Throw Configuration="POWER SUPPLY SUPPORT CIRCUIT", Width=1.65mm
U7: "Buck Adjustable 2A 2.7V~5.5V SOT-23-5 DC-DC Converters ROHS", LCSC Part Number=C78988

## Nets (pads, with @x,y where several pads share a name; then routed paths per layer and width w, separated by ;. In a path a pad name is that pad's centre, name@x,y a point inside that pad or via, vN(x,y) a via of type N, cw(c..) or ccw(c..) an arc to the next point about the centre after c; other vN are vias at no path point)
+3V3: C4.2 C5.2 C15.2 C16.2 C21.2 C29.2 C30.5 D19.3 ESP32-S3-WROOM-1U-N16R8.2 L1.2 R2.2 R17.2 R24.2 R32.2 R36.2 R37.1 SCREEN1.2 SCREEN1.8 U2.7 U3.7 U4.7 U5.7
+3V3_FTDI: C9.2 C10.2 U1.10 U1.11 U1.20
+5V: C7.2 C8.2 C17.2 D1.1 D5.1 D11.2 J1.1 Q4.1 R8.2 R22.2 U1.12 U6.4
+5V_VBUS1: C6.2 D1.2 D2.2 G1.A4B9 G1.B4A9
+5V_VBUS2: C11.2 D5.2 D6.2 G2.A4B9 G2.B4A9
+500V: C26.2 D14.1 R29.2 R30.1
+Vin_Buck: C20.2 C23.2 C24.2 C25.2 D11.1 L2.1 Q4.2 R28.2 R39.1 U7.4
Bat_sens: C22.2 ESP32-S3-WROOM-1U-N16R8.6 R26.1 R27.1
Buck_EN: R39.2 SW3.2 U7.1
Buzzer_Signal: ESP32-S3-WROOM-1U-N16R8.31 LS1.1
CHIP_PU: C2.2 C3.2 ESP32-S3-WROOM-1U-N16R8.3 R1.2 R2.1 SW2.1 SW2.2
CON1_USB_N: D3.2 G1.A7 G1.B7 R6.1
CON1_USB_P: D4.2 G1.A6 G1.B6 R7.1
DTR_FTDI: Q2.2 R3.1 U1.18
ESP_USB_N: D7.2 ESP32-S3-WROOM-1U-N16R8.13 G2.A7 G2.B7
ESP_USB_P: D8.2 ESP32-S3-WROOM-1U-N16R8.14 G2.A6 G2.B6
FTDI_USB_N: R6.2 U1.9
FTDI_USB_P: R7.2 U1.8
GEIGER_DETECT_OUTPUT: C30.4 ESP32-S3-WROOM-1U-N16R8.39
GM_ANODE: C31.1 J1.3 R30.2
GND: C1.1 C2.1 C3.1 C4.1 C5.1 C6.1 C7.1 C8.1 C9.1 C10.1 C11.1 C12.1 C13.1 C14.1 C15.1 C16.1 C17.1 C18.1 C19.2 C20.1 C21.1 C22.1 C23.1 C24.1 C25.1 C26.1 C27.1 C28.1 C30.2 D2.1 D3.1 D4.1 D6.1 D7.1 D8.1 D18.2 D20.1 ESP32-S3-WROOM-1U-N16R8.1 ESP32-S3-WROOM-1U-N16R8.40 ESP32-S3-WROOM-1U-N16R8.41 ESP32-S3-WROOM-1U-N16R8.42 ESP32-S3-WROOM-1U-N16R8.43 ESP32-S3-WROOM-1U-N16R8.44 ESP32-S3-WROOM-1U-N16R8.45 ESP32-S3-WROOM-1U-N16R8.46 ESP32-S3-WROOM-1U-N16R8.47 ESP32-S3-WROOM-1U-N16R8.48 ESP32-S3-WROOM-1U-N16R8.49 G1.A1B12 G1.B1A12 G1.S1 G1.S2 G1.S3 G1.S4 G2.A1B12 G2.B1A12 G2.S1 G2.S2 G2.S3 G2.S4 J1.2 LS1.2 Q3.2 Q5.2 Q6.3 R9.1 R10.1 R11.1 R12.1 R13.1 R16.1 R21.1 R23.2 R25.2 R27.2 R35.1 R38.1 SCREEN1.1 SW1.3 SW1.4 SW2.3 SW2.4 SW3.3 U1.3 U1.13 U1.21 U2.4 U3.4 U4.4 U5.4 U6.2 U7.2
GPIO0: C1.2 R5.2 SW1.1 SW1.2
GPIO3: ESP32-S3-WROOM-1U-N16R8.15
GPIO46: ESP32-S3-WROOM-1U-N16R8.16
HV_FB: C28.2 ESP32-S3-WROOM-1U-N16R8.12 ESP32-S3-WROOM-1U-N16R8.38 R34.2 R35.2
HV_PWM: Q5.1 R32.1
NetC13_2: C13.2 R18.2 R19.2 U3.3 U5.2
NetC14_2: C14.2 R17.1 R20.2 U2.2
NetC27_2: C27.2 D13.1 R29.1 R31.1
NetC29_1: C29.1 C30.3 C31.2 D20.3 R36.1
NetC30_1: C30.1 D19.1 R37.2 R38.2
NetD9_1: D9.1 D10.2 R15.1
NetD9_2: D9.2 U5.6
NetD10_1: D10.1 R18.1
NetD12_1: D12.1 U6.1
NetD12_2: D12.2 R22.1
NetD13_2: D13.2 L2.2 Q6.2
NetD14_2: D14.2 D15.1
NetD15_2: D15.2 D16.1
NetD16_2: D16.2 D17.1
NetD17_2: D17.2 D18.1
NetG1_A5: G1.A5 R10.2
NetG1_B5: G1.B5 R9.2
NetG2_A5: G2.A5 R13.2
NetG2_B5: G2.B5 R12.2
NetL1_1: L1.1 U7.3
NetQ1_1: Q1.1 R3.2
NetQ1_3: Q1.3 R1.1
NetQ2_1: Q2.1 R4.2
NetQ2_3: Q2.3 R5.1
NetQ3_3: Q3.3 R19.1
NetQ5_3: Q5.3 Q6.1 R28.1
NetR14_2: R14.2 R16.2 U4.2
NetR14_3: R14.3 U4.6 U5.3
NetR20_3: R20.3 R21.2
NetR23_1: R23.1 U6.5
NetR24_1: R24.1 R25.1 U7.5
NetR31_2: R31.2 R33.1
NetR33_2: R33.2 R34.1
RTS_FTDI: Q1.2 R4.1 U1.19
Scint_Interrupt: ESP32-S3-WROOM-1U-N16R8.5 U2.6
Scint_out_Signal: ESP32-S3-WROOM-1U-N16R8.4 R15.2 U2.3 U3.2 U3.6
Scint_Reset: ESP32-S3-WROOM-1U-N16R8.22 Q3.1
Screen_CLK: ESP32-S3-WROOM-1U-N16R8.20 SCREEN1.7 SCREEN1.11
Screen_CS: ESP32-S3-WROOM-1U-N16R8.18 SCREEN1.3
Screen_DC_RS: ESP32-S3-WROOM-1U-N16R8.23 SCREEN1.5
Screen_MISO: ESP32-S3-WROOM-1U-N16R8.21 SCREEN1.9 SCREEN1.13
Screen_MOSI: ESP32-S3-WROOM-1U-N16R8.19 SCREEN1.6 SCREEN1.12
Screen_Reset: ESP32-S3-WROOM-1U-N16R8.8 SCREEN1.4
SD_CLK: ESP32-S3-WROOM-1U-N16R8.17 SCREEN1.15
SD_CS: ESP32-S3-WROOM-1U-N16R8.10 SCREEN1.18
SD_MISO: ESP32-S3-WROOM-1U-N16R8.11 SCREEN1.16
SD_MOSI: ESP32-S3-WROOM-1U-N16R8.7 SCREEN1.17
SIPM_SIGNAL: C12.2 J1.0 U4.3
Touch_CS: ESP32-S3-WROOM-1U-N16R8.9 SCREEN1.10
U0RXD: ESP32-S3-WROOM-1U-N16R8.36 U1.17
U0TXD: ESP32-S3-WROOM-1U-N16R8.37 U1.1
V_BAT: C18.2 C19.1 Q4.3 R26.2 U6.3
VBUS_SENSE: R8.1 R11.2 U1.16
pads on no net: D19.2 D20.2 ESP32-S3-WROOM-1U-N16R8.24 ESP32-S3-WROOM-1U-N16R8.25 ESP32-S3-WROOM-1U-N16R8.26 ESP32-S3-WROOM-1U-N16R8.27 ESP32-S3-WROOM-1U-N16R8.28 ESP32-S3-WROOM-1U-N16R8.29 ESP32-S3-WROOM-1U-N16R8.30 ESP32-S3-WROOM-1U-N16R8.32 ESP32-S3-WROOM-1U-N16R8.33 ESP32-S3-WROOM-1U-N16R8.34 ESP32-S3-WROOM-1U-N16R8.35 G1.A8 G1.B8 G2.A8 G2.B8 R14.1 R20.1 SCREEN1.14 SCREEN1.21 SW3.1 SW3.26 SW3.27 U1.2 U1.4 U1.5 U1.6 U1.7 U1.14 U1.15 U2.1 U2.5 U2.8 U3.1 U3.5 U3.8 U4.1 U4.5 U4.8 U5.1 U5.5 U5.8

## Text inside footprints (layer, text, board x,y; h text height)
J1: Top Overlay "HV" at 60.146,98.046 h1.52 r180
Q6: Top Overlay "*" at 207.084,-79.828 h1.27; Top 3D Body "*" at 208.354,-76.297 h1.27; Top 3D Body "RefDes2" at 209.116,-72.805 h1.27
R20: Top Overlay "REFDES" at 42.165,51.323 h1.27 r270; Top Overlay "RefDes" at 42.165,51.005 h1.27 r270; Top 3D Body "RefDes2" at 42.165,51.323 h1.27 r270